# Altium PCB ld_pulser_testboard.PcbDoc
Units mm, origin at the board's own origin, x right, y up, seen from the top; angles counter-clockwise.
Board outline 56 x 49 mm, 2 copper layers (Top Layer, Bottom Layer), stack 0.97 mm thick; 23 components, 12 nets, 93 pads, 721 vias.
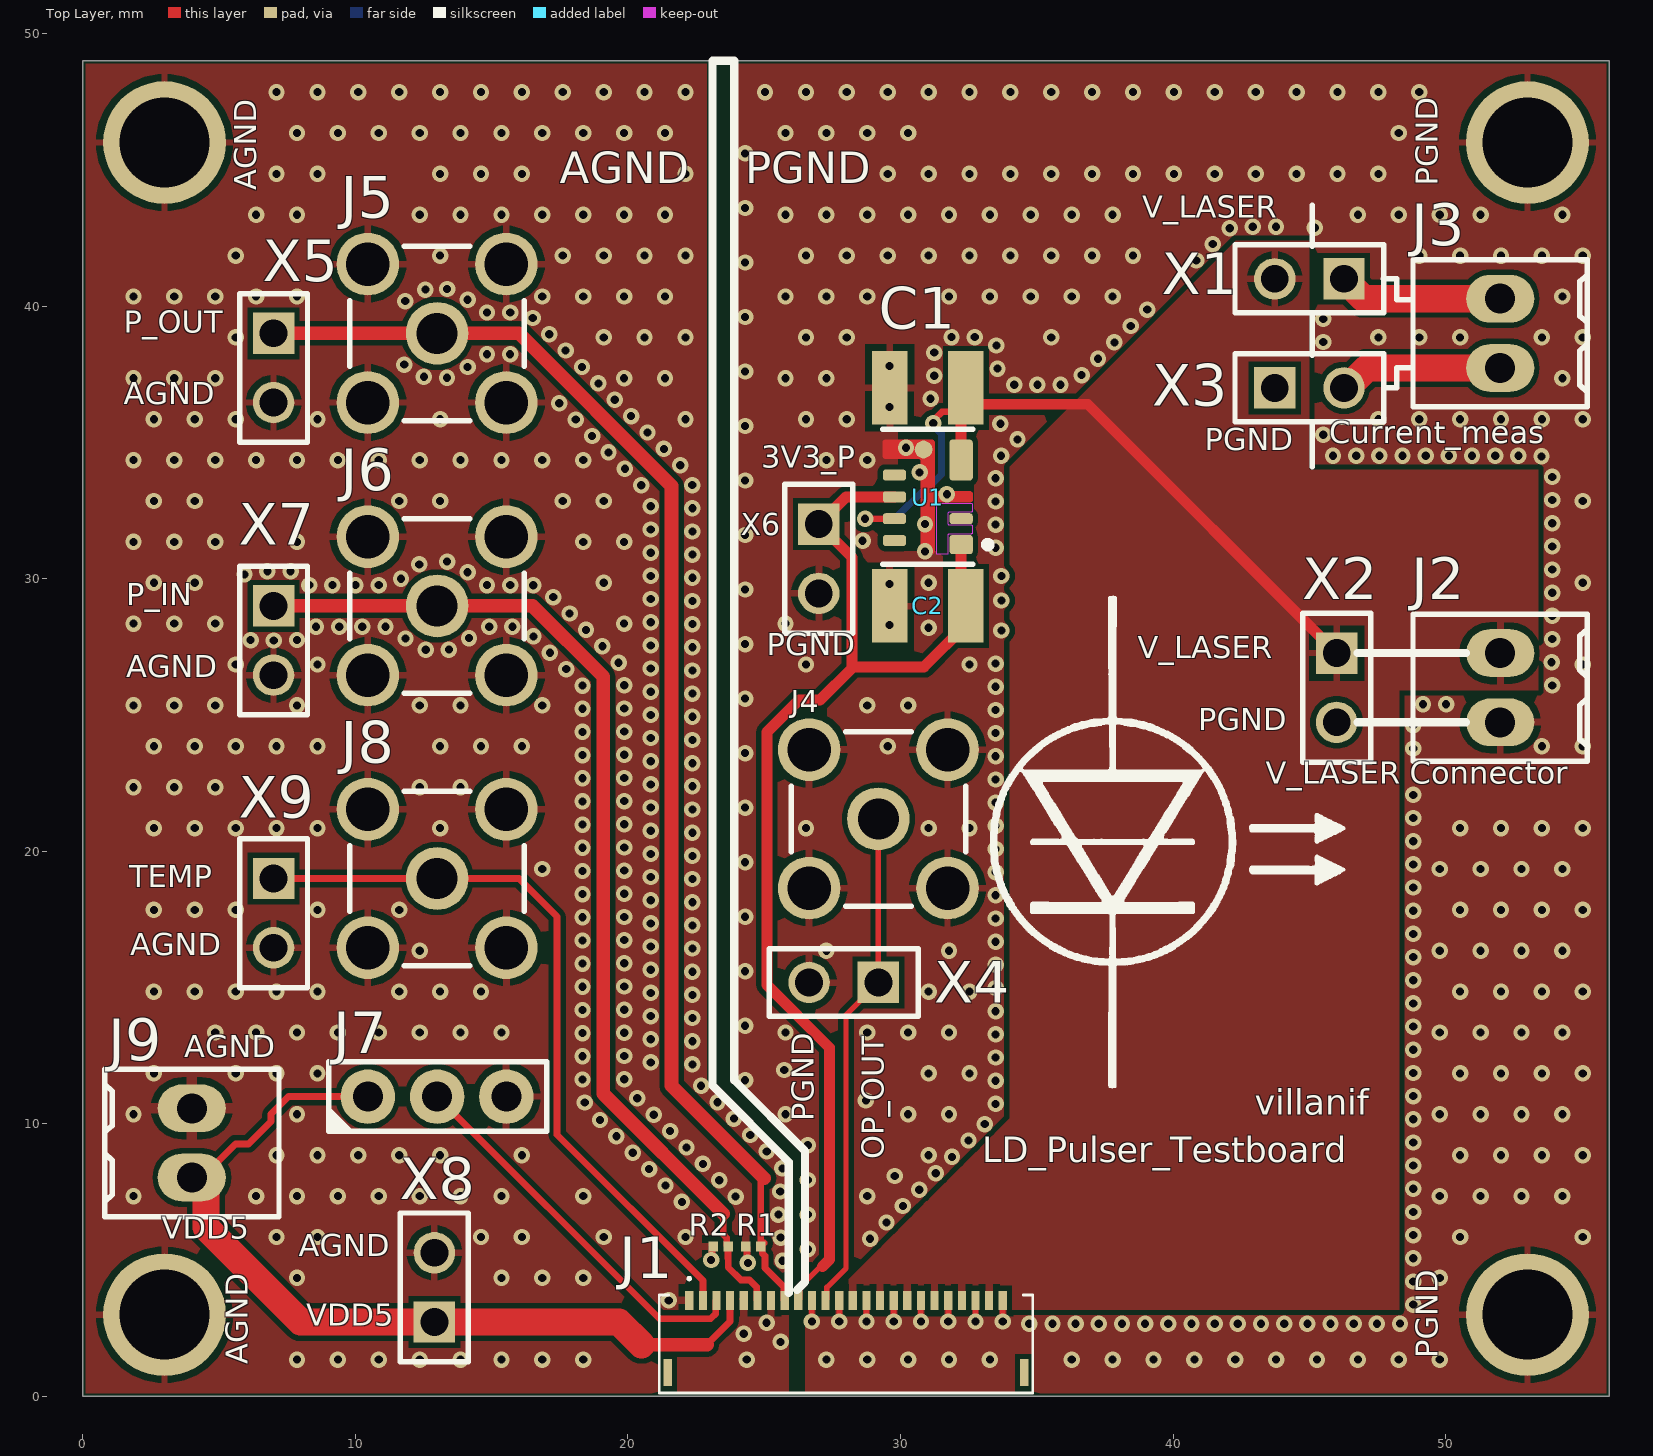
[diagram p0: Top Layer view]
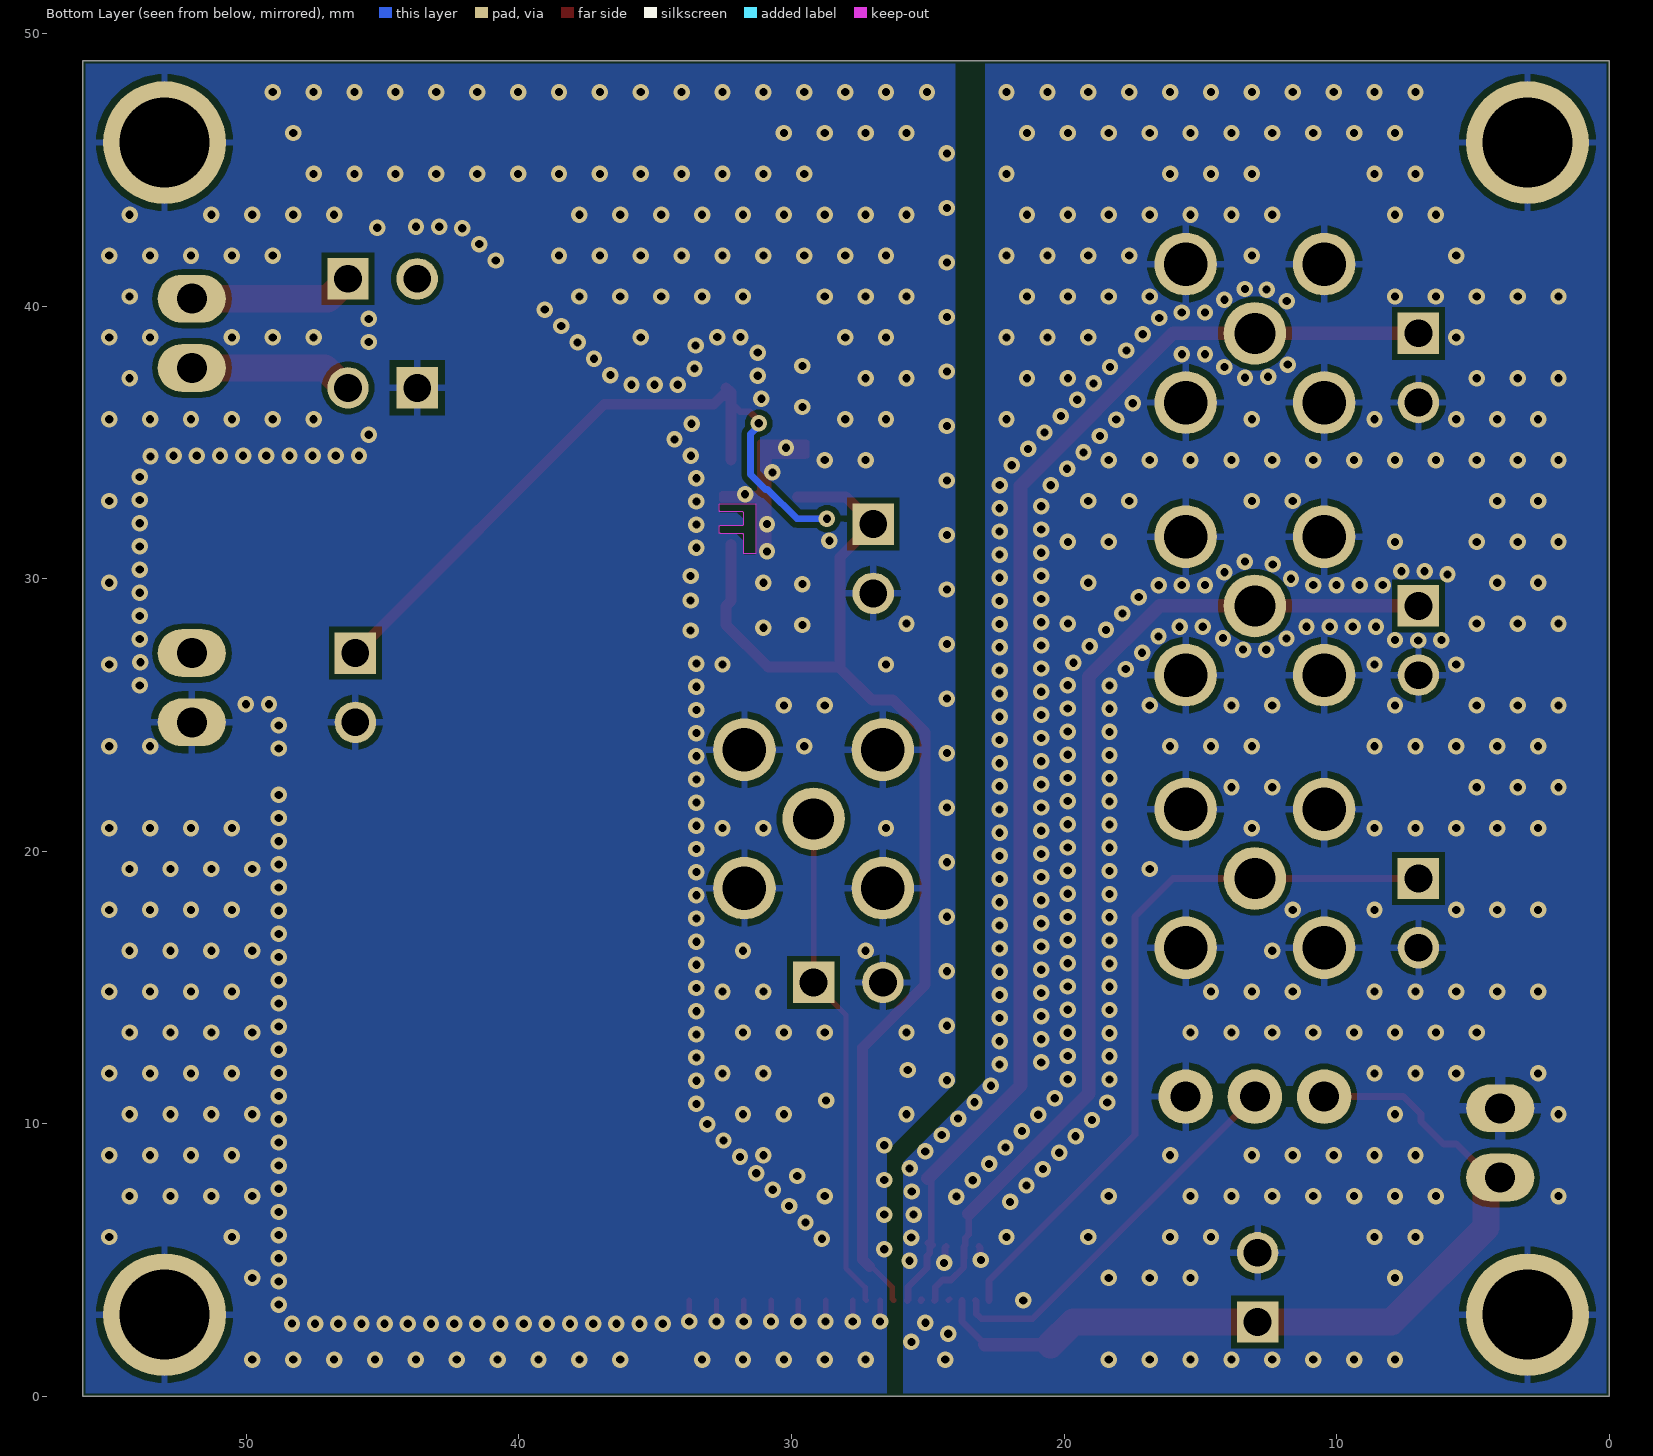
[diagram p1: Bottom Layer view, seen from below]
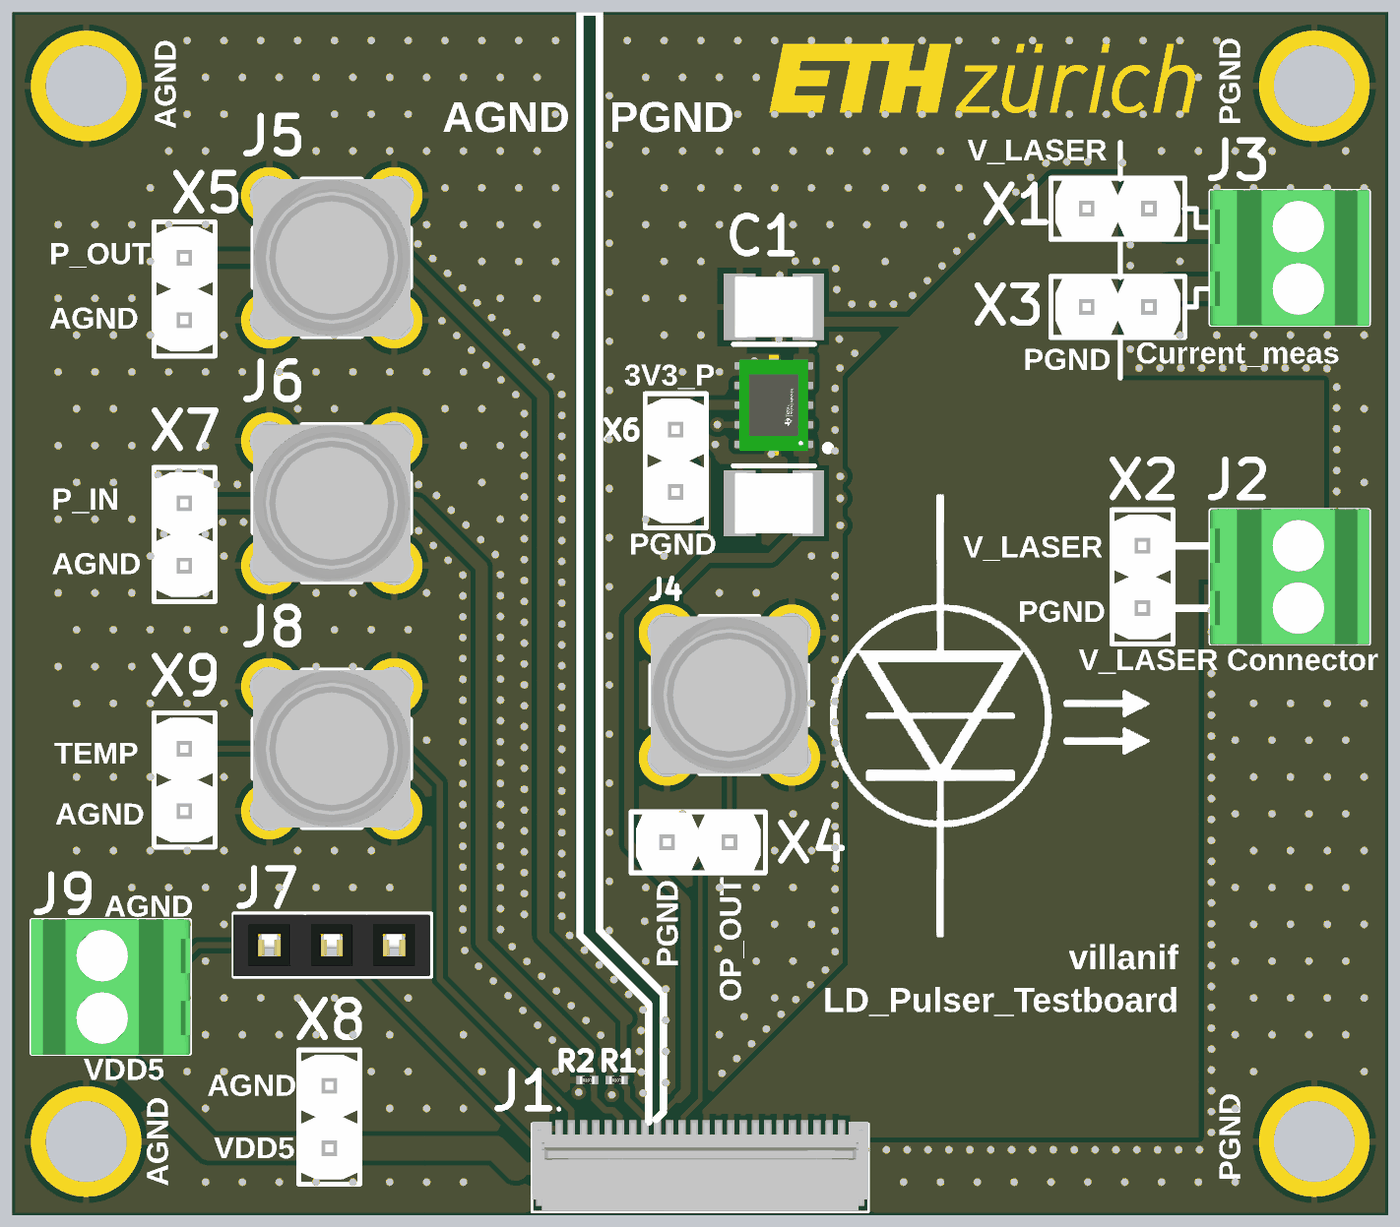
[diagram p2: 3D render of the assembled board from above, using the file's embedded part models]

## Layer stack, top to bottom
Top Solder: solder mask 0.001, SM-001, Dk 4
Top Layer: signal copper 0.035
Dielectric 3: core 0.9, Core-009, Dk 4.5
Bottom Layer: signal copper 0.035
Bottom Solder: solder mask 0.001, SM-001, Dk 4

## Board outline
0,0 0,49 56,49 56,0

## Design rules (kind name [scope] priority, off if disabled: settings)
AcuteAngle [All] p1: minimum=4.50000000000000E+0001 checktracksonly=FALSE
BoardOutlineClearance BoardOutlineClearance_1 [(OnLayer('Bottom Overlay') OR OnLayer('Top Overlay')) OR InComponent('D*')] p1: gap=0 ignorepadtopadclearanceinfootprint=FALSE
BoardOutlineClearance [All] p2: gap=0.1 ignorepadtopadclearanceinfootprint=FALSE
Clearance Clearance_2 [All vs OnLayer('Keep-Out Layer')] p1: gap=0.01 ignorepadtopadclearanceinfootprint=FALSE
Clearance Clearance_1 [All] p2: gap=0.2 ignorepadtopadclearanceinfootprint=FALSE
ComponentClearance [All] p1: gap=0.1 collisioncheckmode=3 verticalgap=0.1 showdistances=FALSE
DiffPairsRouting DiffPair_DiffPairsRouting [InDifferentialPair ('D1') Or InDifferentialPair ('D')] p1: maxlimit=0.192 minlimit=0.192 mostfreqgap=0.192 toplayer_minwidth=0.17 toplayer_maxwidth=0.17 toplayer_prefwidth=0.17 bottomlayer_minwidth=0.17 bottomlayer_maxwidth=0.17 bottomlayer_prefwidth=0.17 impedanceprofiledriven=TRUE maxuncoupledlength=12.7
DiffPairsRouting [All] p2: maxlimit=0.192 minlimit=0.192 mostfreqgap=0.192 toplayer_minwidth=0.17 toplayer_maxwidth=0.17 toplayer_prefwidth=0.17 bottomlayer_minwidth=0.17 bottomlayer_maxwidth=0.17 bottomlayer_prefwidth=0.17 impedanceprofiledriven=TRUE maxuncoupledlength=12.7
Height [All] p1: minheight=0 maxheight=100.4 prefheight=2.5
HoleSize microvia_holesize [IsLinkedToPadViaTemplate('v30h15m0') Or IsLinkedToPadViaTemplate('v30h15')   Or IsLinkedToPadViaTemplate('v30h15mx0')] p1: absolutevalues=TRUE maxlimit=0.15 minlimit=0.15 maxpercent=80.000 minpercent=20.000
HoleSize [All] p2: absolutevalues=TRUE maxlimit=5 minlimit=0.2 maxpercent=80.000 minpercent=20.000
HoleToHoleClearance [All] p1: gap=0.14 allowstackedmicrovias=FALSE
MatchedLengths DiffPair_MatchedLengths [InDifferentialPair ('D1') Or InDifferentialPair ('D')] p1: tolerance=0.5 checknetsindiffpair=TRUE checkdiffpairvsdiffpair=FALSE checkxsignals=FALSE checkothers=FALSE
MinimumAnnularRing [All] p1: minimumring=0.074
MinimumSolderMaskSliver [All] p1: minsoldermaskwidth=0.125
PlaneClearance [All] p1: clearance=0.15
PlaneConnect [All] p1: planeconnectstyle=Relief reliefexpansion=0.4 reliefentries=4 reliefconductorwidth=0.25 reliefairgap=0.25
PolygonConnect [All] p1: thpad.connectstyle=Relief thpad.reliefconductorwidth=0.25 thpad.reliefentries=4 thpad.polygonreliefangle="90 Angle" thpad.airgapwidth=0.25 smdpad.connectstyle=Relief smdpad.reliefconductorwidth=0.25 smdpad.reliefentries=4 smdpad.polygonreliefangle="90 Angle" smdpad.airgapwidth=0.25 via.connectstyle=Direct via.reliefconductorwidth=0.25 via.reliefentries=4 via.polygonreliefangle="90 Angle" via.airgapwidth=0.25
RoutingCorners [All] p1: cornerstyle=45-Degree minsetback=1.5 maxsetback=1.5
RoutingVias [All] p1: holewidth=0.3 width=0.6 viastyle="Through Hole" minholewidth=0.3 minwidth=0.6 maxholewidth=0.7 maxwidth=1.5
SilkToSilkClearance [All] p1: silktosilkclearance=0
SilkToSolderMaskClearance [IsPad] p1: minsilkscreentomaskgap=0 clearancetoexposedcopper=TRUE
SolderMaskExpansion SolderMaskExpansion_1 [IsVia] p1: expansion=0.05 istentingtop=TRUE
SolderMaskExpansion [All] p2: expansion=0 istentingtop=FALSE
Width [All] p1: maxlimit=1 minlimit=0.2 preferedwidth=0.2
19 further rules are at their usual default settings.

## Components (designator, comment, footprint, x,y, rotation, side; value= is the part's Value field where it differs from the comment)
C1 "10 µF" "CAP 1210_3225 - 1MM" 31,37 r0 top
C2 "10 µF" "CAP 1210_3225 - 1MM" 31,29 r0 top
J1 "503480-2400" 5034802400 28,2 r0 top
J2 "282834-2" "TE 282834-2" 52,26 r270 top
J3 "282834-2" "TE 282834-2" 52,39 r270 top
J4 "1470510-1" 5-1814832-1 29.187,21.187 r270 top
J5 "1470510-1" 5-1814832-1 13,39 r270 top
J6 "1470510-1" 5-1814832-1 13,29 r0 top
J7 "M20-7820342" "HARWIN M20-7820345" 13,11 r90 top
J8 "1470510-1" 5-1814832-1 13,19 r270 top
J9 "282834-2" "TE 282834-2" 4,9.3 r90 top
R1 "51" "RES 0201_0603" 24.6,5.5 r0 top
R2 "51" "RES 0201_0603" 23.4,5.5 r0 top
U1 "TPSM265R1V3SILR" FP-SIL0010C-MFG 31,33 r180 top
X1 "68000-102HLF" 68000-102HLF 45,41 r180 top
X2 "68000-102HLF" 68000-102HLF 46,26 r270 top
X3 "68000-102HLF" 68000-102HLF 45,37 r0 top
X4 "68000-102HLF" 68000-102HLF 27.917,15.187 r180 top
X5 "68000-102HLF" 68000-102HLF 7,37.73 r270 top
X6 "68000-102HLF" 68000-102HLF 27,30.73 r270 top
X7 "68000-102HLF" 68000-102HLF 7,27.73 r270 top
X8 "68000-102HLF" 68000-102HLF 12.9,4 r90 top
X9 "68000-102HLF" 68000-102HLF 7,17.73 r270 top

## Footprints (in the part's own frame and the unit in brackets; to place one, negate y for a bottom-side part, rotate by r counter-clockwise, add the part's x,y. Pads: shape width x height; smd on the part's side, far side on the other; paste and mask are expansions set on the pad)
5-1814832-1 [mm]
  round 2.3 hole 1.5: 1(0,0)
  round 2.3 hole 1.6: 2(-2.54,2.54) 3(2.54,2.54) 4(-2.54,-2.54) 5(2.54,-2.54)
  silkscreen extent -3.2,-3.2 3.2,3.2, body extent -3.2,-3.2 3.2,3.2, height 9.51
68000-102HLF [mm]
  rect 1.52x1.52 hole 1.02: 1(-1.27,0)
  round 1.52 hole 1.02: 2(1.27,0)
  silkscreen extent -2.73,-1.24 2.73,1.24, body extent -2.54,-1.21 2.54,1.21, height 8.39
5034802400 [mm]
  rect 0.3x0.7 smd: 1(-5.75,1.525) 2(-5.25,1.525) 3(-4.75,1.525) 4(-4.25,1.525) 5(-3.75,1.525) 6(-3.25,1.525) 7(-2.75,1.525) 8(-2.25,1.525) 9(-1.75,1.525) 10(-1.25,1.525) 11(-0.75,1.525) 12(-0.25,1.525) 13(0.25,1.525) 14(0.75,1.525) 15(1.25,1.525) 16(1.75,1.525) 17(2.25,1.525) 18(2.75,1.525) 19(3.25,1.525) 20(3.75,1.525) 21(4.25,1.525) 22(4.75,1.525) 23(5.25,1.525) 24(5.75,1.525)
  rect 0.3x1 smd: MP1(-6.54,-1.125) MP2(6.54,-1.125)
  silkscreen extent -6.85,-1.88 6.85,2.37, body extent -6.85,-1.8 6.85,1.8, height 1.87
"CAP 1210_3225 - 1MM" [mm] "Chip Capacitor, 2-Leads, Body 3.20x2.50mm, IPC Medium Density"
  rect 1.3x2.7 smd: 1(-1.4,0) 2(1.4,0)
  body extent -1.6,-1.25 1.6,1.25, height 1
FP-SIL0010C-MFG [mm]
  rrect29% 0.85x0.7 smd paste-1000 mask-1000: 1(-1.225,1.75)
  rrect50% 0.85x0.4 smd paste-1000 mask-1000: 2(-1.225,0.8) 7(1.225,-0.8) 8(1.225,0) 9(1.225,0.8) 10(1.225,1.6)
  round 0.65 smd paste-1000 mask-1000: 3-6-11(0.155,-1.739)
  rrect24% 0.85x1.5 smd paste-1000 mask-1000: 4-5(-1.225,-1.35)
  Top Layer region: -0.15,2.1 -0.2,2.087 -0.237,2.05 -0.25,2 -0.25,2 -0.25,0.3 -0.258,0.262 -0.279,0.229 -0.312,0.208 -0.35,0.2 -0.35,0.2 -1.55,0.2 -1.6,0.187 -1.637,0.15 -1.65,0.1 -1.65,0.1 -1.65,-0.1 -1.637,-0.15 -1.6,-0.187 -1.55,-0.2 -1.55,-0.2 -0.35,-0.2 -0.312,-0.208 -0.279,-0.229 -0.258,-0.262 -0.25,-0.3 -0.25,-0.3 -0.25,-2 -0.237,-2.05 -0.2,-2.087 -0.15,-2.1 -0.15,-2.1 1.55,-2.1 1.6,-2.087 1.637,-2.05 1.65,-2 1.65,-2 1.65,-1.5 1.637,-1.45 1.6,-1.413 1.55,-1.4 1.55,-1.4 0.35,-1.4 0.3,-1.387 0.263,-1.35 0.25,-1.3 0.25,-1.3 0.25,2 0.237,2.05 0.2,2.087 0.15,2.1 0.15,2.1 0.15,2.1
  Keep-Out Layer region: -0.705,2.095 -0.73,2.088 -0.748,2.07 -0.755,2.045 -0.755,2.045 -0.755,1.395 -0.759,1.376 -0.77,1.36 -0.786,1.349 -0.805,1.345 -0.805,1.345 -1.605,1.345 -1.63,1.338 -1.648,1.32 -1.655,1.295 -1.655,1.295 -1.655,1.095 -1.648,1.07 -1.63,1.052 -1.605,1.045 -1.605,1.045 -0.805,1.045 -0.786,1.041 -0.77,1.03 -0.759,1.014 -0.755,0.995 -0.755,0.995 -0.755,0.595 -0.759,0.576 -0.77,0.56 -0.786,0.549 -0.805,0.545 -0.805,0.545 -1.605,0.545 -1.63,0.538 -1.648,0.52 -1.655,0.495 -1.655,0.495 -1.655,0.295 -1.648,0.27 -1.63,0.252 -1.605,0.245 -1.605,0.245 -0.355,0.245 -0.336,0.249 -0.32,0.26 -0.309,0.276 -0.305,0.295 -0.305,0.295 -0.305,2.045 -0.312,2.07 -0.33,2.088 -0.355,2.095 -0.355,2.095 -0.355,2.095
  silkscreen extent -2.33,-2.47 1.65,2.47, body extent -1.75,-2.2 1.75,2.2, height 0.25
"HARWIN M20-7820345" [mm] "2.54mm DIL PC TAIL PIN HEADER ASSEMBLY"
  round 2 hole 1.1: 1(0,2.54) 2(0,0) 3(0,-2.54)
  silkscreen extent -1.27,-4.03 1.27,4, body extent -1.25,-4.01 1.25,4.01, height 8.5
"RES 0201_0603" [mm] "Chip Resistor, 2-Leads, Body 0.60x0.30mm, IPC Medium Density"
  rect 0.35x0.35 smd: 1(-0.275,0) 2(0.275,0)
  body extent -0.3,-0.15 0.3,0.15, height 0.21
"TE 282834-2" [mm]
  oval 1.75x2.5 hole 1.1: 1(-1.27,0) 2(1.27,0)
  silkscreen extent -2.7,-3.2 2.7,3.2, body extent -2.77,-3.25 2.77,3.25, height 10

## Part data
C1 C2: library part GRM32EC72A106ME05L, "CAP CER 10UF 100V X7S 1210", Device Package="1210 (3225 Metric)", manufacturer="Murata Electronics", Operating Temperature="-55°C ~ 125°C", Supplier Part Number 1=490-GRM32EC72A106ME05LCT-ND, Temperature Coefficient=X7S, Tolerance=±20%, Voltage - Rated=100V, Applications="General Purpose", Capacitance="10 µF", componentlink1description=Datasheet, componentlink1url=https://search.murata.co.jp/Ceramy/image/img/A01X/G101/ENG/GRM32EC72A106ME05-01A.pdf, componentlink2description="DigiKey Link", componentlink2url=https://www.digikey.com/en/products/detail/murata-electronics/GRM32EC72A106ME05L/16033383, lastupdated="16/07/2023 19:11:38", Lifecycle Status=Active, Minimum Order=1, Mounting Type="Surface Mount, MLCC", Package / Case="1210 (3225 Metric)", packaging=TapeAndReel, Part Number=GRM32EC72A106ME05L, Part Status=Active, partid=44868, price=0.28, series=GRM, Size / Dimension="0.126\" L x 0.098\" W (3.20mm x 2.50mm)", Supplier 1=Digi-Key, Thickness (Max)="0.106\" (2.70mm)"
J1: "Connector", Manufacturer_Name=Molex, Mouser Part Number=538-503480-2400, Datasheet Link=https://componentsearchengine.com/Datasheets/1/503480-2400.pdf, Height=1.87mm, Manufacturer_Part_Number=503480-2400, Mouser Price/Stock=https://www.mouser.co.uk/ProductDetail/Molex/503480-2400?qs=OAhjpuo3Vu7efIoxFh9AOw%3D%3D
J2 J3 J9: "TERM BLK 2P SIDE ENT 2.54MM PCB", Color=Green, Current=10A, manufacturer="TE Connectivity AMP Connectors", Supplier Part Number 1=A98333-ND, Voltage=150V, componentlink1description=Datasheet, componentlink1url=https://www.te.com/commerce/DocumentDelivery/DDEController?Action=srchrtrv&DocNm=282834&DocType=Customer+Drawing&DocLang=English, componentlink2description="DigiKey Link", componentlink2url=http://digikey.com/product-detail/en/te-connectivity-amp-connectors/282834-2/A98333-ND/1150135, lastupdated="15/01/2020 04:15:38", Lifecycle Status=Active, Mating Orientation="Horizontal with Board", Minimum Order=1, Mounting Type="Through Hole", Number of Levels=1, packaging=Bulk, Part Number=282834-2, Part Status=Active, Pitch="0.100\" (2.54mm)", Positions Per Level=2, price=0.88, series=Buchanan, Supplier 1=DigiKey, Wire Gauge="16-30 AWG", Wire Termination="Screw - Rising Cage Clamp"
J4 J5 J6 J8: library part CMP-00606-1, "SMA Connector Jack, Female Socket 50 Ohm Through Hole Solder", Case/Package=SMA, Dielectric Material=PTFE, Frequency=6GHz, manufacturer="TE Connectivity", Package Quantity=100, Supplier Part Number=A119269-ND, Body Material=Brass, componentlink1description=1470510-1?RQPN=1470510-1, componentlink1url=http://www.te.com/catalog/pn/en/1470510-1?RQPN=1470510-1, Connector Type=SMA,Jack, ELV=Compliant, Gender=Male, Impedance=50R, Length=13.97mm, Manufacturer Part Number=1470510-1, Mount="Through Hole", Orientation=Straight, packaging=Bag, PCB Mounting Orientation=Vertical, Radiation Hardening=No, Supplier=Digi-Key, Termination=Solder
J7: "CONN RCPT 3POS 0.1 GOLD PCB", Current Rating (Amps)=3A, Insulation Color=Black, manufacturer="Harwin Inc.", Material Flammability Rating="UL94 V-0", Operating Temperature="-40°C ~ 105°C", Supplier Part Number 1=952-1783-ND, componentlink1description=Datasheet, componentlink1url=https://cdn.harwin.com/pdfs/Harwin_PC_Connectors_M20.pdf, componentlink2description="DigiKey Link", componentlink2url=https://www.digikey.com/en/products/detail/harwin-inc/M20-7820342/3727752, Connector Type=Receptacle, Contact Finish - Mating=Gold, Contact Finish - Post=Tin, Contact Finish Thickness - Mating=Flash, Contact Length - Post="0.118\" (3.00mm)", Contact Type="Female Socket", Fastening Type=Push-Pull, Insulation Height="0.335\" (8.51mm)", lastupdated="21/09/2022 18:55:13", Lifecycle Status=Active, Mated Stacking Heights="11.04mm, 12.63mm", Minimum Order=1, Mounting Type="Through Hole", Number of Positions=3, Number of Positions Loaded=All, Number of Rows=1, packaging=Tube, Part Number=M20-7820342, Part Status=Active, Pitch - Mating="0.100\" (2.54mm)", price=0.42, series=M20, Style="Board to Board or Cable", Supplier 1=DigiKey, Termination=Solder
R1 R2: library part ERJ-1GNF51R0C, "RES SMD 51 OHM 1% 1/20W 0201", Case/Package=0201, manufacturer=Panasonic, Manufacturer Part Number=ERJ1GNF51R0C, Max Operating Temperature=125°C, Min Operating Temperature=-55°C, Package Height=0.23mm, Package Length=0.6mm, Package Shape=Rectangular, Package Style=SMTMeter, Package Width=0.3mm, Power=50mW, Rated Temperature=70°C, Resistor Type="FIXED RESISTOR", Supplier Part Number=667-ERJ-1GNF51R0C, Temperature Coefficient=200ppm/°C, Tolerance=1%, Working Voltage=25V, Category="Chip SMD Resistors", componentlink1description=https://datasheet.ciiva.com:443/pdfs/VipMasterIC/IC/PANA/PANA-S-A0009889626/PANA-S-A0009889626-1.pdf?src-supplier=IHS+Markit, componentlink1url=https://datasheet.ciiva.com:443/pdfs/VipMasterIC/IC/PANA/PANA-S-A0009889626/PANA-S-A0009889626-1.pdf?src-supplier=IHS+Markit, componentlink2description=https://datasheet.ciiva.com/43467/1678782-43467023.pdf?src-supplier=Farnell, componentlink2url=https://datasheet.ciiva.com/43467/1678782-43467023.pdf?src-supplier=Farnell, ComponentLink3Description=https://datasheet.ciiva.com/24130/aoa0000ce2-24130655.pdf?src-supplier=Mouser, ComponentLink3URL=https://datasheet.ciiva.com/24130/aoa0000ce2-24130655.pdf?src-supplier=Mouser, ComponentLink4Description=https://datasheet.ciiva.com/46375/1678782-46375932.pdf?src-supplier=Element14, ComponentLink4URL=https://datasheet.ciiva.com/46375/1678782-46375932.pdf?src-supplier=Element14, ComponentLink5Description=https://datasheet.ciiva.com/7891/aoa0000ce2-7891288.pdf?src-supplier=Element14, ComponentLink5URL=https://datasheet.ciiva.com/7891/aoa0000ce2-7891288.pdf?src-supplier=Element14, Construction=Rectangular, JESD-609 Code=e3, Mounting Technology="Surface Mount", packaging="Tape and Reel", Pins=2, Pricing="1=0.1, 10=0.033, 50=0.033, 100=0.015, 1000=0.011, 10000=0.007 (USD)", Reach SVHC Compliant=Yes, Reference Standard=AEC-Q200, RoHS=Yes, RoHS Compliant=Yes, Stock=39473, Supplier=Mouser, Supplier 1=Mouser, Supplier Part Number 1=667-ERJ-1GNF51R0C, Technology="METAL GLAZE/THICK FILM", Terminal Finish=Nickel, Termination=Wraparound
U1: library part CMP-04918-000593-1, "3-V TO 65-V INPUT, 100-MA, STEP-"
X1 X2 X3 X6 X8: library part CMP-00100-3, "2 Positions Header, Unshrouded Connector 0.100\" (2.54mm) Through Hole Gold or Gold, GXT™", Case/Package=100, Colour=Black, Current Rating=3A, Flammability Rating="UL94 V-0", Insulation Resistance=5GR, manufacturer="Amphenol FCI", Max Operating Temperature=125°C, Max Voltage Rating (AC)=1.5kV, Min Operating Temperature=-65°C, Supplier Part Number=609-3500-ND, componentlink1description=68000-274228-5149165.pdf, componentlink1url=https://datasheet.ciiva.com/5149/68000-274228-5149165.pdf, componentlink2description=68000-722084.pdf, componentlink2url=https://datasheet.ciiva.com/722/68000-722084.pdf, ComponentLink3Description=68000-10149324.pdf, ComponentLink3URL=https://datasheet.ciiva.com/10149/68000-10149324.pdf, ComponentLink4Description=68000-16726309.pdf, ComponentLink4URL=https://datasheet.ciiva.com/16726/68000-16726309.pdf, Connector Type="Male Pin", Contact Gender=Male, Contact Material=Bronze, Contact Mating Length=0.23inch, Contact Plating=Nickel,Gold,GXT, Depth=2.41mm, Gender=Male, Housing Colour=Black, Housing Material=Thermoplastic, Lead Free="Lead Free", Length=5.08mm, Manufacturer Part Number=68000-102HLF, Mating Post Length=5.84mm, Number of Contacts=2, Number of Positions=2, Number of Rows=1, Orientation=Straight, Package Quantity=100, packaging=Bulk, Pitch=2.54mm, Radiation Hardening=No, Supplier=Digikey, Termination=Solder, Termination Post Length=2.41mm, Voltage Rating=1.5kV, Voltage Rating (DC)=1.5kV
X4 X5 X7 X9: library part CMP-00100-3_1, "2 Positions Header, Unshrouded Connector 0.100\" (2.54mm) Through Hole Gold or Gold, GXT™", Case/Package=100, Colour=Black, Current Rating=3A, Flammability Rating="UL94 V-0", Insulation Resistance=5GR, manufacturer="Amphenol FCI", Max Operating Temperature=125°C, Max Voltage Rating (AC)=1.5kV, Min Operating Temperature=-65°C, Supplier Part Number=609-3500-ND, componentlink1description=68000-274228-5149165.pdf, componentlink1url=https://datasheet.ciiva.com/5149/68000-274228-5149165.pdf, componentlink2description=68000-722084.pdf, componentlink2url=https://datasheet.ciiva.com/722/68000-722084.pdf, ComponentLink3Description=68000-10149324.pdf, ComponentLink3URL=https://datasheet.ciiva.com/10149/68000-10149324.pdf, ComponentLink4Description=68000-16726309.pdf, ComponentLink4URL=https://datasheet.ciiva.com/16726/68000-16726309.pdf, Connector Type="Male Pin", Contact Gender=Male, Contact Material=Bronze, Contact Mating Length=0.23inch, Contact Plating=Nickel,Gold,GXT, Depth=2.41mm, Gender=Male, Housing Colour=Black, Housing Material=Thermoplastic, Lead Free="Lead Free", Length=5.08mm, Manufacturer Part Number=68000-102HLF, Mating Post Length=5.84mm, Number of Contacts=2, Number of Positions=2, Number of Rows=1, Orientation=Straight, Package Quantity=100, packaging=Bulk, Pitch=2.54mm, Radiation Hardening=No, Supplier=Digikey, Termination=Solder, Termination Post Length=2.41mm, Voltage Rating=1.5kV, Voltage Rating (DC)=1.5kV

## Free pads (board coordinates)
  round 4.5 hole 3.3: 2(3,3) 2(3,46) 2(53,3) 2(53,46)

## Via types
v1: diameter 0.6, hole 0.3, Top Layer to Bottom Layer, tented both sides, 721 vias

## Nets (pads, with @x,y where several pads share a name; then routed paths per layer and width w, separated by ;. In a path a pad name is that pad's centre, name@x,y a point inside that pad or via, vN(x,y) a via of type N, cw(c..) or ccw(c..) an arc to the next point about the centre after c; other vN are vias at no path point)
3V3_P: C2.2 J1.9 U1.1 U1.8 X6.1 | length 43.2
  Top Layer w0.2: J1.9 26.3,3.575 26.3,3.999 27.063,4.762 27.137,4.762
  Top Layer w0.4: 27.137,4.762 27.4,5.025 27.4,12.793 25.097,15.096 25.097,24.369 26.276,25.548 27.048,25.548 28.227,26.727 28.227,30.773 X6.1 28,33 U1.8 ; 28.227,26.767 30.867,26.767 32.4,28.3 C2.2 32.225,29.175 U1.1
AGND: J1.1 J1.5 J1.7 J5.2 J5.3 J5.4 J5.5 J6.2 J6.3 J6.4 J6.5 J7.3 J8.2 J8.3 J8.4 J8.5 J9.2 pad.2@3,3 pad.2@3,46 R1.1 R2.1 X5.2 X7.2 X8.2 X9.2 | length 1.3
  Top Layer w0.2: J1.5@24.2,3.575 J1.5
  Top Layer w0.25: v1(23.052,5.008) 23.089,5.044 23.089,5.464 R2.1 ; R1.1 24.362,5.462 24.362,4.938 v1(24.4,4.9) ; J1.7@25.225,3.55 J1.7
  Bottom Layer w0.25: v1@23.052,4.952 v1(23.052,5.008)
  other v1: 7.86,1.35 9.36,1.35 10.86,1.35 12.36,1.35 13.86,1.35 15.36,1.35 16.86,1.35 18.36,1.35 24.36,1.35 25.6,2 24.25,2.3 25.087,2.702 21.5,3.525 7.86,4.35 15.36,4.35 16.86,4.35 18.36,4.35 25.67,4.978 25.604,5.825 7.11,5.85 8.61,5.85 14.61,5.85 16.11,5.85 19.11,5.85 22.11,5.85 25.52,6.671 21.981,7.138 23.951,7.331 1.86,7.35 6.36,7.35 7.86,7.35 9.36,7.35 10.86,7.35 12.36,7.35 13.86,7.35 15.36,7.35 18.36,7.35 25.586,7.519 21.38,7.739 23.35,7.932 20.779,8.34 25.666,8.365 22.748,8.533 7.11,8.85 8.61,8.85 10.11,8.85 11.61,8.85 13.11,8.85 16.11,8.85 20.178,8.941 25.091,8.991 22.147,9.134 19.576,9.542 24.49,9.592 21.546,9.735 18.975,10.143 23.889,10.193 20.945,10.336 1.86,10.35 7.86,10.35 18.415,10.782 23.288,10.794 20.344,10.937 22.686,11.395 18.335,11.628 19.865,11.639 2.61,11.85 5.61,11.85 7.11,11.85 8.61,11.85 22.365,12.182 20.835,12.253 18.335,12.478 19.865,12.489 22.365,13.032 20.835,13.103 18.335,13.328 4.86,13.35 6.36,13.35 7.86,13.35 9.36,13.35 10.86,13.35 12.36,13.35 13.86,13.35 15.36,13.35 19.865,13.339 22.365,13.882 20.835,13.953 18.335,14.178 19.865,14.189 22.365,14.732 20.835,14.803 2.61,14.85 4.11,14.85 5.61,14.85 7.11,14.85 8.61,14.85 11.61,14.85 13.11,14.85 14.61,14.85 18.335,15.028 19.865,15.039 22.365,15.582 20.835,15.653 18.335,15.878 19.865,15.889 12.36,16.35 22.365,16.432 20.835,16.503 18.335,16.728 19.865,16.739 22.365,17.282 20.835,17.353 18.335,17.578 19.865,17.589 2.61,17.85 4.11,17.85 5.61,17.85 8.61,17.85 11.61,17.85 22.365,18.132 20.835,18.203 18.335,18.428 19.865,18.439 22.365,18.982 20.835,19.053 18.335,19.278 19.865,19.289 16.86,19.35 22.365,19.832 20.835,19.903 18.335,20.128 19.865,20.139 22.365,20.682 20.835,20.753 2.61,20.85 4.11,20.85 5.61,20.85 7.11,20.85 8.61,20.85 13.11,20.85 18.335,20.978 19.865,20.989 22.365,21.532 20.835,21.603 18.335,21.828 19.865,21.839 1.86,22.35 3.36,22.35 4.86,22.35 12.36,22.35 13.86,22.35 22.365,22.382 20.835,22.453 18.335,22.678 19.865,22.689 22.365,23.232 20.835,23.303 18.335,23.528 19.865,23.539 2.61,23.85 4.11,23.85 5.61,23.85 7.11,23.85 8.61,23.85 13.11,23.85 14.61,23.85 16.11,23.85 22.365,24.082 20.835,24.153 18.335,24.378 19.865,24.389 22.365,24.932 20.835,25.003 18.335,25.228 19.865,25.239 1.86,25.35 3.36,25.35 4.86,25.35 7.86,25.35 12.36,25.35 13.86,25.35 16.86,25.35 22.365,25.782 20.835,25.853 18.335,26.078 19.865,26.089 22.365,26.632 17.737,26.682 20.835,26.703 5.61,26.85 8.61,26.85 19.659,26.914 17.136,27.283 12.582,27.391 13.432,27.396 22.365,27.482 19.062,27.519 20.835,27.553 7.009,27.73 6.159,27.746 7.859,27.75 11.841,27.808 14.169,27.82 16.535,27.884 18.461,28.12 8.557,28.235 9.407,28.235 10.257,28.235 11.107,28.235 14.911,28.235 15.761,28.235 22.365,28.332 1.86,28.35 3.36,28.35 4.86,28.35 19.86,28.35 20.835,28.403 17.86,28.721 22.365,29.182 20.835,29.253 17.259,29.322 8.308,29.765 9.158,29.765 10.008,29.765 10.858,29.765 14.83,29.765 15.68,29.765 16.53,29.759 2.61,29.85 4.11,29.85 19.11,29.85 11.675,30 22.365,30.032 20.835,30.103 5.932,30.156 14.12,30.233 6.774,30.27 7.624,30.27 12.343,30.525 13.367,30.626 22.365,30.882 20.835,30.953 1.86,31.35 3.36,31.35 4.86,31.35 7.86,31.35 18.36,31.35 19.86,31.35 22.365,31.732 20.835,31.803 22.365,32.582 20.835,32.653 2.61,32.85 4.11,32.85 11.61,32.85 13.11,32.85 17.61,32.85 19.11,32.85 20.489,33.43 22.358,33.432 19.888,34.031 21.921,34.16 1.86,34.35 3.36,34.35 4.86,34.35 6.36,34.35 7.86,34.35 9.36,34.35 10.86,34.35 12.36,34.35 13.86,34.35 15.36,34.35 16.86,34.35 18.36,34.35 19.287,34.632 21.32,34.761 18.686,35.233 20.719,35.363 18.085,35.834 2.61,35.85 4.11,35.85 5.61,35.85 8.61,35.85 13.11,35.85 22.11,35.85 20.118,35.964 17.484,36.435 19.517,36.565 18.916,37.166 1.86,37.35 3.36,37.35 4.86,37.35 19.86,37.35 21.36,37.35 13.365,37.374 12.516,37.406 14.119,37.766 18.315,37.767 11.793,37.854 14.828,38.235 15.678,38.235 17.714,38.368 5.61,38.85 19.11,38.85 20.61,38.85 22.11,38.85 17.113,38.969 16.506,39.564 14.83,39.765 15.68,39.765 11.832,40.182 14.12,40.233 1.86,40.35 3.36,40.35 4.86,40.35 6.36,40.35 7.86,40.35 16.86,40.35 18.36,40.35 19.86,40.35 21.36,40.35 12.569,40.604 13.367,40.626 5.61,41.85 13.11,41.85 17.61,41.85 19.11,41.85 20.61,41.85 22.11,41.85 6.36,43.35 7.86,43.35 12.36,43.35 13.86,43.35 15.36,43.35 16.86,43.35 18.36,43.35 19.86,43.35 21.36,43.35 7.11,44.85 8.61,44.85 13.11,44.85 14.61,44.85 16.11,44.85 22.11,44.85 7.86,46.35 9.36,46.35 10.86,46.35 12.36,46.35 13.86,46.35 15.36,46.35 16.86,46.35 18.36,46.35 19.86,46.35 21.36,46.35 7.11,47.85 8.61,47.85 10.11,47.85 11.61,47.85 13.11,47.85 14.61,47.85 16.11,47.85 17.61,47.85 19.11,47.85 20.61,47.85 22.11,47.85
NetJ3_1: J3.1 X1.1 | length 6
  Top Layer w1: X1.1 47,40.27 J3.1
NetJ3_2: J3.2 X3.2 | length 6
  Top Layer w1: X3.2 46.386,37 47.116,37.73 J3.2
OP_OUT: J1.11 J4.1 X4.1 | length 18.5
  Top Layer w0.2: J1.11 27.3,3.575 27.3,3.892 27.3,3.999 28,4.699 28,14 X4.1 J4.1
PGND: C1.1 C2.1 J1.10 J1.12 J1.14 J1.16 J1.18 J1.20 J1.22 J1.24 J2.2 J4.2 J4.3 J4.4 J4.5 pad.2@53,3 pad.2@53,46 U1.3-6-11 X2.2 X3.1 X4.2 X6.2 | length 6.2
  Top Layer w0.2: v1(26.75,2.75) J1.10 ; v1(27.75,2.75) J1.12 ; v1(28.75,2.75) J1.14 ; v1(29.75,2.75) J1.16 ; v1(30.75,2.75) J1.18 ; v1(31.75,2.75) J1.20 ; v1(32.75,2.75) J1.22 ; v1(33.75,2.75) J1.24
  other v1: 27.28,1.35 28.78,1.35 30.28,1.35 31.78,1.35 33.28,1.35 36.28,1.35 37.78,1.35 39.28,1.35 40.78,1.35 42.28,1.35 43.78,1.35 45.28,1.35 46.78,1.35 48.28,1.35 49.78,1.35 34.725,2.665 35.575,2.665 36.425,2.665 37.275,2.665 38.125,2.665 38.975,2.665 39.825,2.665 40.675,2.665 41.525,2.665 42.375,2.665 43.225,2.665 44.075,2.665 44.925,2.665 45.775,2.665 46.625,2.665 47.475,2.665 48.325,2.67 48.81,3.368 48.81,4.218 49.78,4.35 48.81,5.068 26.6,5.4 28.886,5.782 50.53,5.85 55.03,5.85 48.81,5.918 29.487,6.383 26.6,6.671 48.81,6.768 30.088,6.984 28.78,7.35 49.78,7.35 51.28,7.35 52.78,7.35 54.28,7.35 30.689,7.585 48.81,7.618 26.6,7.943 29.787,8.086 31.29,8.186 48.81,8.468 31.891,8.787 31.03,8.85 50.53,8.85 52.03,8.85 53.53,8.85 55.03,8.85 26.6,9.214 48.81,9.318 32.492,9.388 33.093,9.989 48.81,10.168 25.78,10.35 30.28,10.35 31.78,10.35 49.78,10.35 51.28,10.35 52.78,10.35 54.28,10.35 33.49,10.733 28.728,10.855 48.81,11.018 33.49,11.583 24.3,11.6 31.03,11.85 32.53,11.85 50.53,11.85 52.03,11.85 53.53,11.85 55.03,11.85 48.81,11.868 25.737,11.973 33.49,12.433 48.81,12.718 33.49,13.283 25.78,13.35 28.78,13.35 30.28,13.35 31.78,13.35 49.78,13.35 51.28,13.35 52.78,13.35 54.28,13.35 48.81,13.568 24.3,13.6 33.49,14.133 48.81,14.418 31.03,14.85 32.53,14.85 50.53,14.85 52.03,14.85 53.53,14.85 55.03,14.85 33.49,14.983 48.81,15.268 24.3,15.6 33.49,15.833 48.81,16.118 27.28,16.35 31.78,16.35 49.78,16.35 51.28,16.35 52.78,16.35 54.28,16.35 33.49,16.683 48.81,16.968 33.49,17.533 24.3,17.6 48.81,17.818 50.53,17.85 52.03,17.85 53.53,17.85 55.03,17.85 33.49,18.383 48.81,18.668 33.49,19.233 49.78,19.35 51.28,19.35 52.78,19.35 54.28,19.35 48.81,19.518 24.3,19.6 33.49,20.083 48.81,20.368 26.53,20.85 31.03,20.85 32.53,20.85 50.53,20.85 52.03,20.85 53.53,20.85 55.03,20.85 33.49,20.933 48.81,21.218 24.3,21.6 33.49,21.783 48.81,22.068 33.49,22.633 33.49,23.483 24.3,23.6 48.81,23.768 29.53,23.85 53.53,23.85 55.03,23.85 33.49,24.333 48.81,24.618 33.49,25.183 28.78,25.35 30.28,25.35 49.165,25.39 50.015,25.39 24.3,25.6 33.49,26.033 53.91,26.084 26.53,26.85 32.53,26.85 55.03,26.85 33.49,26.883 53.884,26.934 24.3,27.6 53.91,27.783 33.7,28.1 31.03,28.2 29.6,28.3 25.78,28.35 53.91,28.633 33.7,29.2 53.91,29.483 24.3,29.6 29.6,29.8 31.03,29.85 55.03,29.85 33.7,30.1 53.91,30.333 30.9,31 33.49,31.133 53.91,31.183 28.61,31.394 24.3,31.6 30.9,32 33.49,31.983 53.91,32.033 33.49,32.833 55.03,32.85 53.91,32.883 31.7,33.1 24.3,33.6 33.49,33.683 53.91,33.733 30.7,33.9 27.28,34.35 28.78,34.35 53.516,34.487 33.689,34.51 45.866,34.51 46.716,34.51 47.566,34.51 48.416,34.51 49.266,34.51 50.116,34.51 50.966,34.51 51.816,34.51 52.666,34.51 30.2,34.8 34.29,35.111 45.51,35.281 24.3,35.6 33.664,35.686 26.53,35.85 28.03,35.85 47.53,35.85 49.03,35.85 50.53,35.85 52.03,35.85 53.53,35.85 55.03,35.85 29.6,36.3 31.103,36.603 34.171,37.114 35.021,37.114 35.871,37.114 25.78,37.35 27.28,37.35 54.28,37.35 31.24,37.442 36.645,37.466 24.3,37.6 33.56,37.704 29.6,37.8 37.246,38.067 31.24,38.292 33.516,38.553 37.847,38.668 45.51,38.681 26.53,38.85 28.03,38.85 31.873,38.86 32.723,38.86 35.53,38.85 47.53,38.85 49.03,38.85 50.53,38.85 53.53,38.85 55.03,38.85 38.448,39.269 45.51,39.531 24.3,39.6 39.049,39.87 25.78,40.35 27.28,40.35 28.78,40.35 31.78,40.35 33.28,40.35 34.78,40.35 36.28,40.35 37.78,40.35 54.28,40.35 24.3,41.6 40.852,41.673 26.53,41.85 28.03,41.85 29.53,41.85 31.03,41.85 32.53,41.85 34.03,41.85 35.53,41.85 37.03,41.85 38.53,41.85 49.03,41.85 50.53,41.85 52.03,41.85 53.53,41.85 55.03,41.85 41.453,42.274 42.076,42.852 45.195,42.871 42.924,42.91 43.774,42.91 25.78,43.35 27.28,43.35 28.78,43.35 30.28,43.35 31.78,43.35 33.28,43.35 34.78,43.35 36.28,43.35 37.78,43.35 46.78,43.35 48.28,43.35 49.78,43.35 51.28,43.35 54.28,43.35 24.3,43.6 29.53,44.85 31.03,44.85 32.53,44.85 34.03,44.85 35.53,44.85 37.03,44.85 38.53,44.85 40.03,44.85 41.53,44.85 43.03,44.85 44.53,44.85 46.03,44.85 47.53,44.85 24.3,45.6 25.78,46.35 27.28,46.35 28.78,46.35 30.28,46.35 48.28,46.35 25.03,47.85 26.53,47.85 28.03,47.85 29.53,47.85 31.03,47.85 32.53,47.85 34.03,47.85 35.53,47.85 37.03,47.85 38.53,47.85 40.03,47.85 41.53,47.85 43.03,47.85 44.53,47.85 46.03,47.85 47.53,47.85 49.03,47.85
PULSE_IN: J1.6 J6.1 R2.2 X7.1 | length 38.6
  Top Layer w0.25: 23.5,6.7 23.5,5.935 23.625,5.81 23.625,5.55 R2.2 23.675,5.06 23.677,5.057 23.677,4.739 24.141,4.275 24.46,4.275 24.725,4.01 24.725,3.55 J1.6
  Top Layer w0.5: X7.1 J6.1 16.5,29 19.1,26.4 19.1,11.1 23.5,6.7
PULSE_OUT: J1.8 J5.1 R1.2 X5.1 | length 48.9
  Top Layer w0.25: R1.2@24.825,5.55 R1.2 ; R1.2@25,5.625 R1.2 ; 25,8 24.875,7.875 R1.2 ; J1.8 25.725,3.55 25.725,4.01 25.025,4.71 25.025,5.159 24.925,5.259 24.925,5.45 R1.2
  Top Layer w0.5: X5.1 J5.1 16,39 21.6,33.4 21.6,11.4 25,8
STDN: J1.3 J7.2 | length 14.2
  Top Layer w0.25: J7.2 21.15,2.85 23.035,2.85 23.225,3.04 23.225,3.5 J1.3
TEMPOUT: J1.2 J8.1 X9.1 | length 27.3
  Top Layer w0.25: X9.1 J8.1 16,19 17.4,17.6 17.4,9.6 22.75,4.25 J1.2
V_LASER: C1.2 J1.13 J1.15 J1.17 J1.19 J1.21 J1.23 J2.1 U1.4-5 U1.9 X1.2 X2.1 | length 28.8
  Top Layer w0.25: v1(28.7,32.2) U1.9 ; v1(31.2,35.7) 31.267,35.767 31.267,35.867 31.521,36.121 31.875,36.121 32.225,36.471 32.4,36.646 32.4,36.85 C1.2
  Top Layer w0.4: U1.4-5 32.225,36.471 32.225,36.825 C1.2 ; C1.2@32.4,36.85 32.502,36.748 32.85,36.4 36.87,36.4 X2.1
  Bottom Layer w0.25: v1(28.7,32.2) 29.8,32.2 30.875,33.275 30.959,33.275 31.5,33.816 31.5,35.305 31.2,35.605 v1(31.2,35.7)
VDD5: J1.4 J7.1 J9.1 X8.1 | length 32.4
  Top Layer w0.25: J9.1@4.217,7.466 4.217,7.872 5.612,9.267 6.08,9.267 6.905,10.091 6.905,10.359 7.546,11 J7.1 ; 22.9,1.9 23.75,2.75 J1.4
  Top Layer w0.5: 20.5,1.9 22.9,1.9
  Top Layer w1: J9.1 4.217,7.813 4.389,7.813 4.519,7.684 4.519,6.211 8,2.73 10,2.73 11.8,2.73 19.67,2.73 20.5,1.9
pads on no net: J1.MP1 J1.MP2 U1.2 U1.7 U1.10

## Polygon pours and split planes (outlines as drawn)
PGND on Top Layer "PGND_L01_P004" (solid, pour order 4): 26.5,0 26.5,9 24,11.5 24,49 56,49 56,0
AGND on Top Layer "AGND_L01_P005" (solid, pour order 5): 25.9,8.6 22.9,11.6 22.9,49 0,49 0,0 25.9,0
V_LASER on Top Layer "V_LASER_L01_P002" (solid, pour order 2): 28.1,3.175 28.1,4.3 34,10.2 34,34.1 42.3,42.4 45,42.4 45,34 53.4,34 53.4,25.9 48.3,25.9 48.3,3.175 28.1,3.175 28.1,3.4
PGND on Bottom Layer "PGND_L02_P003" (solid, pour order 3): 26.5,0 26.5,9 24,11.5 24,49 56,49 56,0
AGND on Bottom Layer "AGND_L02_P001" (solid, pour order 1): 25.9,8.6 22.9,11.6 22.9,49 0,49 0,0 25.9,0

## Other copper
Top Layer:
  pour cut-out: 29.9,31 32.7,31 32.7,35.5 29.9,35.5 29.9,35.3

## Silkscreen, mask and mechanical layers (free items; w line width, h text height)
Top Overlay:
  drawing of 23 lines, arcs and shapes, not listed
  text "PGND" at 49.983,44.409 h1.4 r90
  text "AGND" at 6.644,44.255 h1.4 r90
  text "AGND" at 17.5,44.124 h2
  text "PGND" at 24.3,44.124 h2
  text "V_LASER" at 38.871,42.963 h1.4
  text "P_OUT" at 1.5,38.747 h1.4
  text "AGND" at 1.5,36.116 h1.4
  text "Current_meas" at 45.733,34.7 h1.4
  text "PGND" at 41.16,34.436 h1.4
  text "3V3_P" at 24.9,33.8 h1.4
  text "P_IN" at 1.6,28.747 h1.4
  text "PGND" at 25.1,26.916 h1.4
  text "V_LASER" at 38.7,26.8 h1.4
  text "AGND" at 1.6,26.116 h1.4
  text "PGND" at 40.93,24.167 h1.4
  text "V_LASER Connector" at 43.4,22.2 h1.4
  text "TEMP" at 1.7,18.4 h1.4
  text "AGND" at 1.74,15.916 h1.4
  text "AGND" at 3.73,12.167 h1.4
  text "PGND" at 27.083,10.1 h1.4 r90
  text "villanif" at 43,10.019 h1.6
  text "OP_OUT" at 29.653,8.7 h1.4 r90
  text "LD_Pulser_Testboard" at 33,8.283 h1.6
  text "VDD5" at 2.9,5.516 h1.4
  text "AGND" at 7.93,4.867 h1.4
  text "VDD5" at 8.2,2.316 h1.4
  text "PGND" at 49.983,1.409 h1.4 r90
  text "AGND" at 6.328,1.188 h1.4 r90
Top Solder:
  drawing of 10 lines, arcs and shapes, not listed
Board:
  the board outline again, w0.3